# Altium PCB pcb.PcbDoc
Units mil, origin at the board's own origin, x right, y up, seen from the top; angles counter-clockwise.
Board outline 3145.67 x 1299.21 mil, 2 copper layers (Top Layer, Bottom Layer); 55 components, 48 nets, 216 pads, 159 vias.
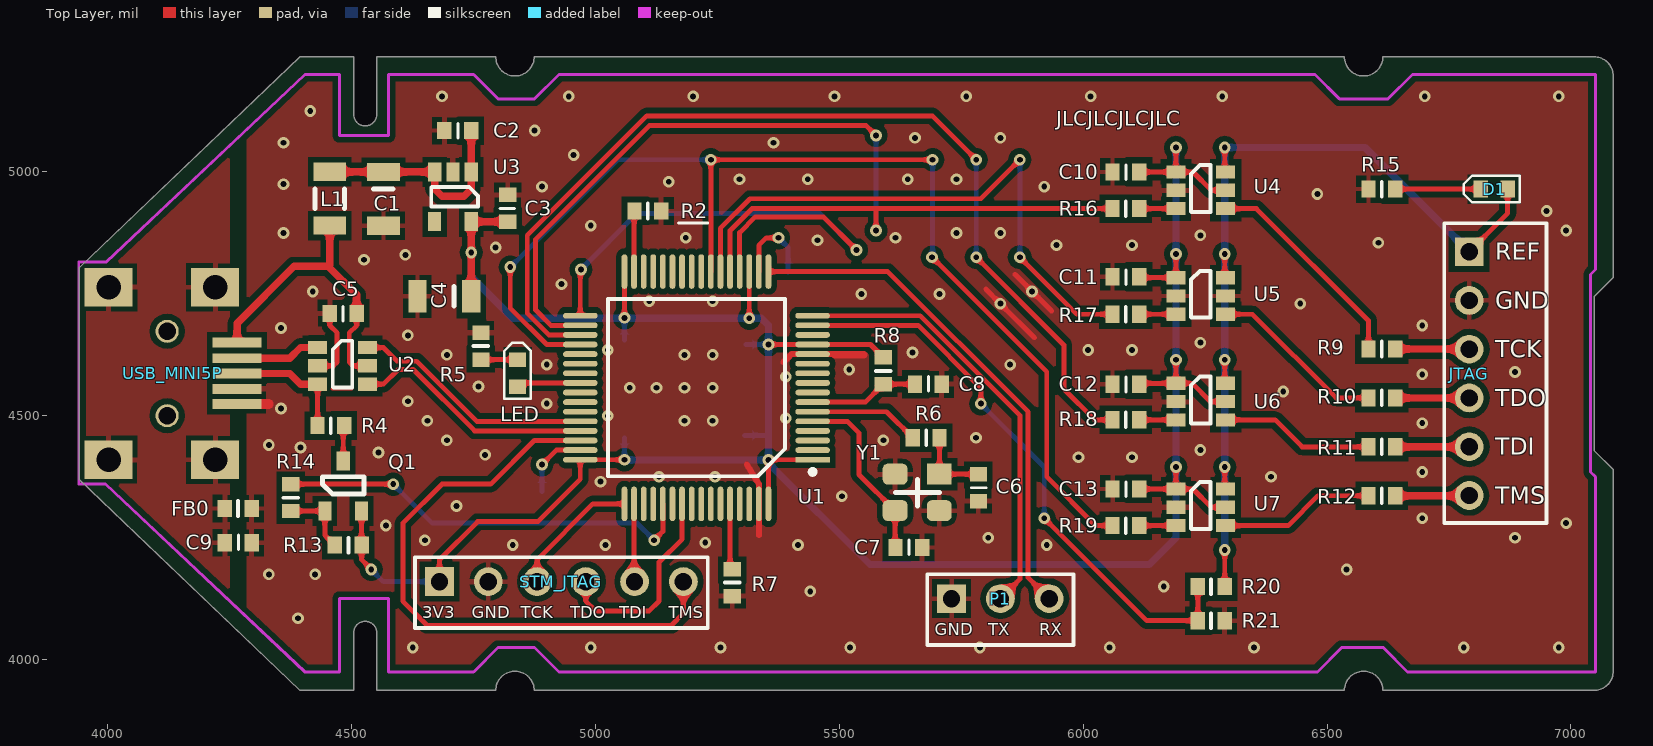
[diagram p0: Top Layer view]
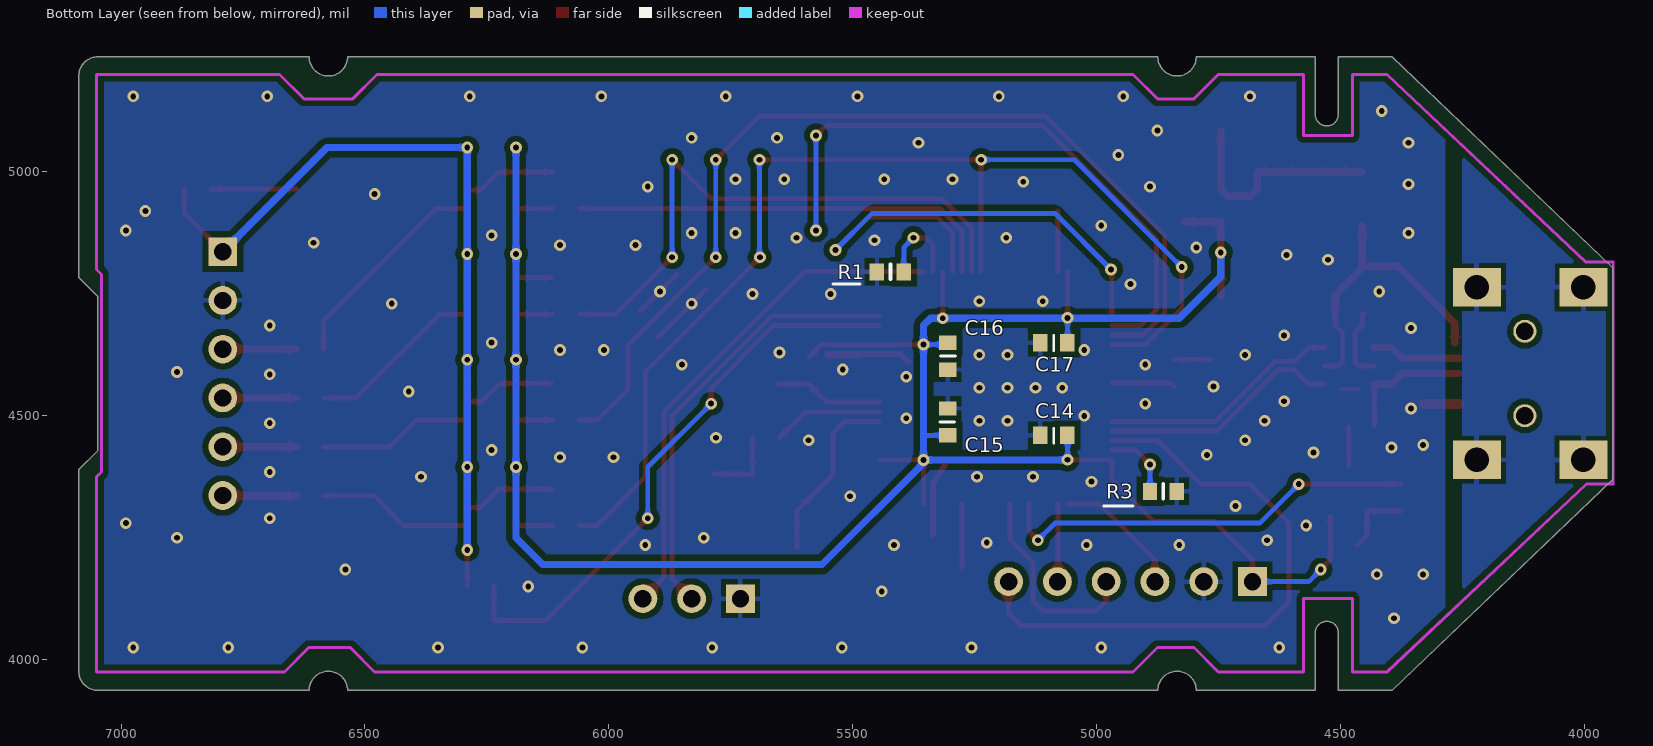
[diagram p1: Bottom Layer view, seen from below]

## Layer stack, top to bottom
Top Solder: solder mask 0.4, Solder Resist, Dk 3.5
Top Layer: signal copper 1.4
Dielectric 1: dielectric 12.6, FR-4, Dk 4.8
Bottom Layer: signal copper 1.4
Bottom Solder: solder mask 0.4, Solder Resist, Dk 3.5

## Board outline
4503.94,3937.01 4503.94,4055.12 cw(c4527.56,4055.12) 4551.18,4055.12 4551.18,3937.01 4795.28,3937.01 cw(c4834.65,3937.01) 4874.02,3937.01 6535.43,3937.01 cw(c6574.8,3937.01) 6614.17,3937.01 7047.24,3937.01 ccw(c7047.24,3976.38) 7086.61,3976.38 7086.61,4389.76 7047.24,4429.13 7047.24,4744.09 7086.61,4783.46 7086.61,5196.85 ccw(c7047.24,5196.85) 7047.24,5236.22 6614.17,5236.22 cw(c6574.8,5236.22) 6535.43,5236.22 4874.02,5236.22 cw(c4834.65,5236.22) 4795.28,5236.22 4551.18,5236.22 4551.18,5118.11 cw(c4527.56,5118.11) 4503.94,5118.11 4503.94,5236.22 4393.7,5236.22 3940.94,4803.15 3940.94,4370.08 4393.7,3937.01

## Design rules (kind name [scope] priority, off if disabled: settings)
Clearance [All] p1: gap=7
PolygonConnect PolygonConnect_via [IsVia vs InNet('GND')] p1: connectstyle=Direct reliefconductorwidth=10 reliefentries=4 polygonreliefangle="90 Angle" airgapwidth=10
PolygonConnect PolygonConnect_normal [All] p2: connectstyle=Relief reliefconductorwidth=10 reliefentries=4 polygonreliefangle="90 Angle" airgapwidth=10
RoutingVias [All] p1: holewidth=12 width=24 viastyle="Through Hole" minholewidth=12 minwidth=24 maxholewidth=200 maxwidth=300
SolderMaskExpansion [All] p1: expansion=4
Width [All] p1: maxlimit=30 minlimit=7 preferedwidth=12
30 further rules are at their usual default settings.

## Components (designator, comment, footprint, x,y, rotation, side; value= is the part's Value field where it differs from the comment)
C1 "CAP" C1206 4565,5000 r270 top
C2 "CAP Ceramics" C0603 4745,5085 r180 top
C3 "CAP Ceramics" C0603 4819.81,4898.03 r90 top
C4 "CAP" C1206 4745,4745 r180 top
C5 "CAP Ceramics" C0603 4510,4710 r180 top
C6 "CAP Ceramics" C0603 5785,4380 r270 top
C7 "CAP Ceramics" C0603 5615,4230 r0 top
C8 "CAP Ceramics" C0603 5655,4565 r0 top
C9 "CAP Ceramics" C0603 4240,4240 r0 top
C10 "CAP Ceramics" C0603 6115,5000 r180 top
C11 "CAP Ceramics" C0603 6115,4785 r180 top
C12 "CAP Ceramics" C0603 6115,4565 r180 top
C13 "CAP Ceramics" C0603 6115,4350 r180 top
C14 "CAP Ceramics" C0603 5060,4460 r0 bottom
C15 "CAP Ceramics" C0603 5305,4460 r90 bottom
C16 "CAP Ceramics" C0603 5305,4650 r270 bottom
C17 "CAP Ceramics" C0603 5060,4650 r0 bottom
D1 "LED" D0603 6870,4965 r180 top
FB0 "RES" R0603 4295,4310 r180 top
JTAG "Header 6" HDR1X6 6791.34,4836.61 r270 top locked
L1 "Inductor" L1206 4455,4890 r90 top
LED "LED" D0603 4840,4560 r90 top
P1 "Header 3" HDR1X3 5730,4125 r0 top
Q1 "S9012-PNP" SOT23-3 4445,4305 r0 top
R1 "Res" R0603 5450,4795 r180 bottom
R2 "Res" R0603 5135,4920 r180 top
R3 "Res" R0603 4835,4345 r0 bottom
R4 "RES" R0603 4485,4480 r180 top
R5 "Res" R0603 4765,4615 r90 top
R6 "Res" R0603 5650,4455 r0 top
R7 "Res" R0603 5280,4130 r90 top
R8 "Res" R0603 5590,4620 r270 top
R9 "RES" R0603 6640,4637 r180 top
R10 "RES" R0603 6640,4536.67 r180 top
R11 "RES" R0603 6640,4436.33 r180 top
R12 "RES" R0603 6640,4336 r180 top
R13 "RES" R0603 4465,4235 r0 top
R14 "RES" R0603 4375,4360 r270 top
R15 "Res" R0603 6640,4965 r180 top
R16 "RES" R0603 6115,4925 r180 top
R17 "RES" R0603 6115,4708.33 r180 top
R18 "RES" R0603 6115,4491.67 r180 top
R19 "RES" R0603 6115,4275 r180 top
R20 "Res" R0603 6290,4150 r180 top
R21 "Res" R0603 6290,4080 r180 top
STM_JTAG "Header 6" HDR1X6 4680,4160 r0 top locked
U1 "STM32F103RCT6" LQFP64_DE12_e0.5_PAD1.8x0.3_offset2.3_mm 5445,4410 r180 top locked
U2 "USBLC6-2SC6" SOT23-6 4430,4640 r270 top locked
U3 "LDO" SOT23-5 4745,5000 r180 top
U4 "SN74LVC1T45DBV" SOT23-6 6190,5000 r270 top
U5 "SN74LVC1T45DBV" SOT23-6 6190,4783.33 r270 top
U6 "SN74LVC1T45DBV" SOT23-6 6190,4566.67 r270 top
U7 "SN74LVC1T45DBV" SOT23-6 6190,4350 r270 top
USB_MINI5P "MiniUSB-SMT-5P" USB_MINI 3915,4803.15 r0 top locked
Y1 "Crystal" SMD3225 5705,4380 r180 top

## Footprints (in the part's own frame and the unit in brackets; to place one, negate y for a bottom-side part, rotate by r counter-clockwise, add the part's x,y. Pads: shape width x height; smd on the part's side, far side on the other; paste and mask are expansions set on the pad)
C0603 [mm]
  rect 0.75x0.9 smd mask+0.1: 1(0,0) 2(1.4,0)
  silkscreen extent 0.7,-0.36 0.7,0.4
C1206 [mm]
  rect 0.95x1.7 smd: 1(0,0) 2(2.8,0)
  silkscreen extent 0.89,-0.51 0.89,0.51
D0603 [mm]
  rect 0.75x0.9 smd mask+0.1: 1(0,0) 2(1.4,0)
  silkscreen extent -0.64,-0.69 2.29,0.69
HDR1X3 [mm] "Connector; Header; 3 Position"
  rect 1.5x1.5 hole 0.9: 1(0,0)
  round 1.5 hole 0.9: 2(2.54,0) 3(5.08,0)
  silkscreen extent -1.27,-2.41 6.35,1.27
HDR1X6 [mm] "Connector; Header; 6 Position"
  rect 1.5x1.5 hole 0.9: 1(0,0)
  round 1.5 hole 0.9: 2(2.54,0) 3(5.08,0) 4(7.62,0) 5(10.16,0) 6(12.7,0)
  silkscreen extent -1.48,-1.3 14.14,4.03
L1206 [mm]
  rect 0.95x1.7 smd: 1(0,0) 2(2.8,0)
  silkscreen extent 0.89,-0.76 1.91,0.76
LQFP64_DE12_e0.5_PAD1.8x0.3_offset2.3_mm [mm]
  rect 1.8x0.3 smd: 1(0,0)
  oval 1.8x0.3 smd: 2(0,-0.5) 3(0,-1) 4(0,-1.5) 5(0,-2) 6(0,-2.5) 7(0,-3) 8(0,-3.5) 9(0,-4) 10(0,-4.5) 11(0,-5) 12(0,-5.5) 13(0,-6) 14(0,-6.5) 15(0,-7) 16(0,-7.5) 33(12.1,-7.5) 34(12.1,-7) 35(12.1,-6.5) 36(12.1,-6) 37(12.1,-5.5) 38(12.1,-5) 39(12.1,-4.5) 40(12.1,-4) 41(12.1,-3.5) 42(12.1,-3) 43(12.1,-2.5) 44(12.1,-2) 45(12.1,-1.5) 46(12.1,-1) 47(12.1,-0.5) 48(12.1,0)
  oval 0.3x1.8 smd: 17(2.3,-9.8) 18(2.8,-9.8) 19(3.3,-9.8) 20(3.8,-9.8) 21(4.3,-9.8) 22(4.8,-9.8) 23(5.3,-9.8) 24(5.8,-9.8) 25(6.3,-9.8) 26(6.8,-9.8) 27(7.3,-9.8) 28(7.8,-9.8) 29(8.3,-9.8) 30(8.8,-9.8) 31(9.3,-9.8) 32(9.8,-9.8) 49(9.8,2.3) 50(9.3,2.3) 51(8.8,2.3) 52(8.3,2.3) 53(7.8,2.3) 54(7.3,2.3) 55(6.8,2.3) 56(6.3,2.3) 57(5.8,2.3) 58(5.3,2.3) 59(4.8,2.3) 60(4.3,2.3) 61(3.8,2.3) 62(3.3,2.3) 63(2.8,2.3) 64(2.3,2.3)
  silkscreen extent -0.13,-8.36 10.66,0.87
R0603 [mm]
  rect 0.75x0.9 smd mask+0.1: 1(0,0) 2(1.4,0)
  silkscreen extent 0.71,-0.38 0.71,0.38
SMD3225 [mil]
  rect 51x43 smd: 1(0.37,-0.37)
  rrect50% 51x43 smd: 2(90.92,-0.37) 3(90.92,74.44) 4(0.37,74.44)
  silkscreen extent 0,10 90,65
SOT23-3 [mm]
  rect 0.69x0.99 smd: 1(0,0) 2(1.906,0) 3(0.953,2.59)
  silkscreen extent -0.13,0.89 2.03,1.78
SOT23-5 [mm] "for LM2731,2010-6-26"
  rect 0.69x0.99 smd: 1(0,0) 2(0.953,0) 3(1.906,0) 4(1.91,2.59) 5(0,2.59)
  silkscreen extent -0.36,0.79 2.08,1.8
SOT23-6 [mm]
  rect 0.69x0.99 smd: 1(0,0) 2(0.953,0) 3(1.906,0) 4(1.906,2.59) 5(0.953,2.59) 6(0,2.59)
  silkscreen extent -0.36,0.79 2.08,1.8
USB_MINI [mil]
  rect 100x20 smd: 1(350,-153) 2(350,-185) 3(350,-216.33) 4(350,-248) 5(350,-279)
  round 47.23 / inner round 0 / far side round 47.23 hole 35.43: H1(206.5,-302.87) H2(206.5,-129.8)
  rect 98x79 hole 50: P1(86.53,-393.33) P2(304.83,-393.33) P3(304.83,-39.33) P4(86.53,-39.33)

## Part data
C1 C4: library part "CAP Polarity", "Polarized Capacitor (Surface Mount)"
C2 C3 C5 C6 C7 C8 C9 C10 C11 C12 C13 C14 C15 C16 C17: "Capacitor"
FB0 R4 R9 R10 R11 R12 R13 R14 R16 R17 R18 R19: "Res"
JTAG STM_JTAG: "Header, 6-Pin"
P1: "Header, 3-Pin"
Q1: library part S9012, "S9012-PNP-SOT23"
R1 R2 R3 R5 R6 R7 R8 R15 R20 R21: library part RES
U1: library part STM32F103R, "ST STM32 Cortex-M3"
U2: library part USBLC6-2, "USB EMI ESD Protect"
U3: library part XC6210B-3.3, "5V->3.3V"
U4 U5 U6 U7: library part SN74LVC1T45, "TI SN74LVC1T45"
USB_MINI5P: library part MiniUSB_5P, "MiniUSB SMT"
Y1: library part CRY

## Via types
v1: diameter 24, hole 12, Top Layer to Bottom Layer, tented both sides, 159 vias

## Nets (pads, with @x,y where several pads share a name; then routed paths per layer and width w, separated by ;. In a path a pad name is that pad's centre, name@x,y a point inside that pad or via, vN(x,y) a via of type N, cw(c..) or ccw(c..) an arc to the next point about the centre after c; other vN are vias at no path point)
3V3: C3.1 C4.1 C10.1 C11.1 C12.1 C13.1 C14.1 C15.1 C16.1 C17.1 Q1.2 R8.1 R13.2 STM_JTAG.1 U1.1 U1.13 U1.19 U1.32 U1.48 U1.64 U3.5 U4.1 U4.5 U5.1 U6.1 U6.5 U7.1 U7.5 | length 5689.3
  Top Layer w10: Q1.2@4520.04,4295 4520.04,4230.08 4520.12,4230 4520.12,4204.88 v1(4540,4185) ; STM_JTAG.1 4680,4205 4758,4283 4881.62,4283 4968.62,4370 U1.48 v1(5059.17,4410) ; v1(5059.17,4700.83) U1.32 ; v1(5315.08,4700.08) U1.19 ; U1.64 v1(5354.45,4409.45) 5355,4410 U1.1 ; v1(5354.45,4646.22) U1.13 5563.78,4646.22 R8.1 ; C13.1@6115.12,4350 U7.1 ; C10.1@6115.12,5000 U4.1 ; C12.1@6116.78,4566.67 U6.1 ; C11.1@6116.78,4783.33 U5.1 v1(6190,4831.97) ; v1(6190,4395) U7.1 ; v1(6190,4615) U6.1 ; v1(6190,5050) U4.1 ; U7.5 6262.52,4312.48 6225,4350 U7.1 ; U6.5 6260.85,4529.15 6223.33,4566.67 U6.1 ; U4.5 6262.52,4962.48 6225,5000 U4.1
  Top Layer w15: C4.1 v1(4745,4835) U3.5 C3.1
  Bottom Layer w10: v1(4540,4185) 4565,4160 STM_JTAG.1 ; v1(5059.17,4410) C14.1@5059.17,4454.17 ; C17.1@5059.17,4655.83 5059.17,4700.08 v1(5059.17,4700.83) ; C15.1 5349.45,4460 ; C16.1@5308.78,4646.22 v1(5354.45,4646.22)
  Bottom Layer w12: v1@5354.45,4403.07 v1(5354.45,4409.45)
  Bottom Layer w15: v1(4745,4835) 4745,4785 4829.92,4700.08 5059.17,4700.08 v1(5315.08,4700.08) 5339.92,4700.08 5354.45,4685.55 v1(5354.45,4646.22) v1(5354.45,4409.45) v1@5059.73,4409.45 ; v1@5354.45,4403.07 5562.52,4195 6135,4195 6190,4250 v1(6190,4395) v1(6190,4615) v1(6190,4831.97) v1(6190,5050)
5V: C1.1 C2.1 L1.2 U3.1 U3.3 | length 457.2
  Top Layer w15: L1.2 U3.3@4669.72,5000.24 ; U3.3 4669.96,4965.04 4685,4950 4730,4950 4745,4965 U3.1 C2.1
GND: C1.2 C2.2 C3.2 C4.2 C5.2 C6.2 C7.2 C8.2 C9.2 C10.2 C11.2 C12.2 C13.2 C14.2 C15.2 C16.2 C17.2 FB0.1 JTAG.2 P1.1 R1.1 R2.1 R3.1 R5.2 R7.1 R15.2 R21.1 STM_JTAG.2 U1.12 U1.63 U2.2 U3.2 U4.2 U5.2 U5.5 U6.2 U7.2 USB_MINI5P.4 USB_MINI5P.5 Y1.2 Y1.4 | length 801.6
  Top Layer w10: U2.2 4462.48,4602.48 4470,4610 4470,4670 4454.88,4685.12 C5.2@4454.88,4705 ; C5.2@4449.88,4710 C5.2@4454.88,4705 ; C5.2 C5.2@4454.88,4705 ; 5800,4760 v1(5830,4730) 5900,4660 ; 5860,4790 v1(5895,4755) 5935,4715
  Top Layer w12: 5310,4400 5334.76,4360 U1.63 5334.76,4255.24 ; 5385,4610 5401.53,4626.53 U1.12 5490,4626.53
  Top Layer w15: 5490.45,4625.04 5550,4624.95
  Top Layer w20: USB_MINI5P.5@4255.51,4524.15 4330,4524.15
  other v1: 4625,4025 4990,4025 5256,4025 5522,4025 5788,4025 6054,4025 6350,4025 6780,4025 6975,4025 4390,4085 5440,4140 6165,4150 4330,4175 4425,4175 6540,4185 4830,4235 5020,4235 5415,4235 5925,4235 5225,4240 4650,4245 5805,4250 6885,4250 4570,4275 6990,4280 6695,4290 4715,4315 5505,4335 5010,4365 5130,4375 5245,4375 6385,4375 6695,4385 5990,4415 6100,4415 4773.56,4420 4555,4425 6240,4430 4395,4435 4330,4440 4695,4450 5590,4450 5780,4455 6695,4485 4655,4490 5182.5,4490 5240,4490 5390,4495 5025,4500 4355,4515 4900,4525 4615,4530 6410,4550 5070,4557.5 5125,4557.5 5182.5,4557.5 5240,4557.5 4760,4560 5390,4580 6695,4585 6885,4590 5520,4595 4900,4605 5850,4605 4695,4625 5182.5,4625 5240,4625 5650,4630 5025,4635 6010,4635 6100,4635 6240,4650 4615,4665 4355,4680 6695,4685 6445,4730 5110,4735 5240,4735 5545,4750 5705,4750 4420,4755 4930,4770 4525,4820 4610,4830 4795,4845 5945,4850 6100,4850 6605,4855 5455,4860 5185,4865 5615,4865 6240,4870 4360,4875 5740,4875 5830,4875 6990,4880 4990,4890 6950,4920 6480,4955 4890,4970 5920,4970 4360,4975 5150,4980 5295,4985 5435,4985 5640,4985 5740,4985 4955,5035 4360,5060 5365,5060 5655,5070 5830,5070 4875,5085 4415,5125 4685,5155 4945,5155 5200,5155 5490,5155 5760,5155 6015,5155 6285,5155 6700,5155 6975,5155
JTAG_TCK: R9.2 U4.4 | length 446.2
  Top Layer w10: U4.4 6355.04,4924.96 6584.88,4695.12 R9.2
JTAG_TDI: R11.2 U6.4 | length 315.8
  Top Layer w10: U6.4 6393.37,4491.63 6448.67,4436.33 R11.2
JTAG_TDO: R10.2 U5.4 | length 364
  Top Layer w10: U5.4 6346.71,4708.29 6518.33,4536.67 R10.2
JTAG_TMS: R12.2 U7.4 | length 318.2
  Top Layer w10: U7.4 6419.96,4274.96 6481,4336 R12.2
NetC6_1: C6.1 R6.2 Y1.1 | length 154.5
  Top Layer w10: Y1.1 C6.1@5785,4380.37 ; Y1.1@5705.12,4380.85 R6.2
NetD1_2: D1.2 R15.1 | length 174.9
  Top Layer w10: R15.1 D1.2
NetJTAG_3: JTAG.3 R9.1 | length 151
  Top Layer w15: R9.1 JTAG.3@6790.95,4637
NetJTAG_4: JTAG.4 R10.1 | length 151.3
  Top Layer w15: R10.1 JTAG.4@6791.29,4536.67
NetJTAG_5: JTAG.5 R11.1 | length 151.1
  Top Layer w15: R11.1 JTAG.5@6791.06,4436.33
NetJTAG_6: JTAG.6 R12.1 | length 150.7
  Top Layer w15: R12.1 JTAG.6@6790.72,4336
NetLED_2: LED.2 R5.1 | length 74.9
  Top Layer w10: R5.1@4765.12,4615.12 LED.2
NetQ1_1: Q1.1 R13.1 R14.2 | length 148.2
  Top Layer w10: R14.2 Q1.1@4444.88,4304.88 ; Q1.1 4445,4255 R13.1
NetQ1_3: Q1.3 R4.1 | length 80.6
  Top Layer w10: Q1.3@4482.52,4396.97 R4.1@4482.52,4477.52
NetR7_2: R7.2 U1.60 | length 130
  Top Layer w10: R7.2@5275.71,4189.41 U1.60
NetR16_1: R16.1 U4.3 | length 75
  Top Layer w10: R16.1 U4.3
NetR17_1: R17.1 U5.3 | length 75
  Top Layer w10: R17.1 U5.3
NetR18_1: R18.1 U6.3 | length 75
  Top Layer w10: R18.1@6115.04,4491.63 U6.3
NetR19_1: R19.1 U7.3 | length 75
  Top Layer w10: R19.1 U7.3
SPI1_MCK: R16.2 U1.21 U1.34 | length 2179.4
  Top Layer w10: U1.34 4908.45,4685.59 4877,4717.04 4877,4862 5110,5095 5555,5095 v1(5575,5075) ; U1.21 5275.71,4880 5320.71,4925 5575,4925 ; v1(5575,4880) 5575,4925 ; R16.2 5575,4925
  Bottom Layer w10: v1(5575,4880) v1(5575,5075)
SPI1_MISO: R17.2 U1.22 | length 1189
  Top Layer w10: U1.22 5256.02,4884.36 5316.67,4945 5790,4945 v1(5870,5025) ; v1(5870,4825) 5986.67,4708.33 R17.2
  Bottom Layer w10: v1(5870,4825) v1@5870,5015
SPI1_MOSI: R19.2 U1.23 U1.36 | length 2367.6
  Top Layer w10: v1(4825,4805) 4825,4720.96 4899.74,4646.22 U1.36 ; U1.23 v1(5236.34,5025) v1(5691,5025) ; v1(5690,4825) 5925,4590 5925,4375 6025,4275 R19.2
  Bottom Layer w10: v1(4825,4805) 5045,5025 v1(5236.34,5025) ; v1@5691,4826 v1(5691,5025)
SPI1_NSS: U1.20 U1.33 | length 1100
  Top Layer w10: U1.33 4968.62,4798.62 v1(4970,4800) ; U1.20 5295.39,4875.64 5327.75,4908 5467,4908 v1(5535,4840)
  Bottom Layer w10: v1(4970,4800) 5085,4915 5460,4915 v1(5535,4840)
SPI2_MISO: R18.2 U1.35 | length 2016.6
  Top Layer w10: U1.35 4904.1,4665.9 4860,4710 4860,4870 5105,5115 5690.5,5115 v1(5780.5,5025) ; v1(5780.5,4825) 5960.5,4645 5960.5,4554.5 6023.33,4491.67 R18.2
  Bottom Layer w10: v1(5780.5,4825) v1(5780.5,5025)
STM_ADC: R20.2 R21.2 U1.15 | length 1190.9
  Top Layer w10: U1.15 5661.33,4685.59 5790,4556.92 v1(5790,4525) ; v1(5920,4290) 6130,4080 R21.2 R20.2
  Bottom Layer w10: v1(5790,4525) 5920,4395 v1(5920,4290)
STM_DM: U1.44 U2.6 | length 499.3
  Top Layer w10: U2.6 4565,4640 4593,4612 4633,4612 4756.26,4488.74 U1.44
STM_DP: U1.45 U2.4 | length 501.3
  Top Layer w10: U2.4 4564.96,4564.96 4595,4595 4625.96,4595 4751.9,4469.06 U1.45
STM_JTCK: STM_JTAG.3 U1.49 | length 271.6
  Top Layer w10: STM_JTAG.3 4880,4205 4994.45,4319.45 U1.49
STM_JTDI: STM_JTAG.5 U1.50 | length 158.3
  Top Layer w10: STM_JTAG.5@5078.86,4161.14 U1.50
STM_JTDO: STM_JTAG.4 U1.55 | length 425.6
  Top Layer w10: STM_JTAG.4 4980,4120 5000,4100 5110,4100 5130,4120 5130,4200 5177.28,4247.28 U1.55
STM_JTMS: STM_JTAG.6 U1.46 | length 1264.8
  Top Layer w10: U1.46 4874.37,4449.37 4785,4360 4685,4360 4605,4280 4605,4120 4655,4070 5155,4070 5180,4095 STM_JTAG.6
STM_LED: LED.1 U1.40 | length 131.7
  Top Layer w10: LED.1 4847.48,4567.48 U1.40
STM_NRST: C8.1 R8.2 U1.7 | length 225.1
  Top Layer w10: U1.7 5553.23,4528.11 R8.2 C8.1@5654.88,4564.88
STM_OSCIN: C7.1 U1.5 Y1.3 | length 370.5
  Top Layer w10: U1.5 5516.26,4488.74 5540,4465 5540,4379.65 Y1.3 C7.1@5614.08,4230
STM_OSCOUT: R6.1 U1.6 | length 227.1
  Top Layer w10: U1.6 5596.57,4508.43 R6.1
STM_PIN18: R1.2 U1.18 | length 178.7
  Top Layer w10: U1.18 5334.76,4849.76 5350,4865 v1(5375,4865)
  Bottom Layer w10: v1(5375,4865) 5394.88,4845.12 R1.2
STM_PIN31: R2.2 U1.31 | length 124.6
  Top Layer w10: U1.31 5078.86,4918.98 R2.2
STM_PIN47: R3.2 U1.47 | length 145.8
  Top Layer w10: v1(4890,4400) 4919.69,4429.69 U1.47
  Bottom Layer w10: R3.2@4890,4345.12 v1(4890,4400)
STM_RX: P1.3 U1.17 | length 1052.6
  Top Layer w10: U1.17 5599.17,4795.83 5887,4508 5887,4168 P1.3
STM_TX: P1.2 U1.16 | length 902.2
  Top Layer w10: U1.16 5665.68,4705.27 5870,4500.96 5870,4165 P1.2
STM_USBEN: R14.1 U1.53 | length 874.5
  Top Layer w10: R14.1 v1(4585,4360) ; v1(5120,4245) 5137.91,4262.91 U1.53
  Bottom Layer w10: v1(4585,4360) 4665,4280 5085,4280 v1(5120,4245)
USB_DM: U2.1 USB_MINI5P.2 | length 183.5
  Top Layer w15: USB_MINI5P.2@4255.51,4618.15 4373.15,4618.15 4395,4640 U2.1
USB_DP: R4.2 U2.3 USB_MINI5P.3 | length 268.4
  Top Layer w10: R4.2@4430,4480.12 U2.3
  Top Layer w15: USB_MINI5P.3@4255.51,4586.82 4373.18,4586.82 4395.04,4564.96 U2.3
USB_SHIED: C9.1 FB0.2 USB_MINI5P.P1 USB_MINI5P.P2 USB_MINI5P.P3 USB_MINI5P.P4
VBUS: C5.1 L1.1 U2.5 USB_MINI5P.1 | length 631.5
  Top Layer w10: C5.1 4510,4685 4495,4670 4495,4610 4502.52,4602.48 U2.5
  Top Layer w15: USB_MINI5P.1 4265,4690 4381.5,4806.5 4451.5,4806.5 ; L1.1@4451.5,4876.5 L1.1@4455,4880 ; L1.1 L1.1@4455,4880 ; C5.1 4510,4748 4451.5,4806.5 ; 4451.5,4806.5 4455,4810 L1.1@4455,4880
VREF: D1.1 JTAG.1 R20.1 U4.6 U5.6 U6.6 U7.6 | length 1837.6
  Top Layer w10: R20.1 v1(6290,4225) ; U7.6@6290,4351.97 v1(6290,4395) ; U6.6@6290,4568.64 v1(6290,4615) ; U5.6@6290,4785.3 v1(6290,4831.97) ; v1(6290,5050) 6290,5001.97 U4.6 ; JTAG.1 6870,4915.28 D1.1
  Bottom Layer w15: v1(6290,4225) v1(6290,4395) v1(6290,4615) v1(6290,4831.97) v1(6290,5050) 6577.95,5050 JTAG.1
pads on no net: U1.2 U1.3 U1.4 U1.8 U1.9 U1.10 U1.11 U1.14 U1.24 U1.25 U1.26 U1.27 U1.28 U1.29 U1.30 U1.37 U1.38 U1.39 U1.41 U1.42 U1.43 U1.51 U1.52 U1.54 U1.56 U1.57 U1.58 U1.59 U1.61 U1.62 U3.4 USB_MINI5P.H1 USB_MINI5P.H2
copper on no net: | length 40
  Top Layer w7: 4460,4555 4500,4555

## Polygon pours and split planes (outlines as drawn)
GND on Top Layer "Bottom Layer-No Net" (solid, remove dead copper, pour order 28): 4355,5275 4780,5275 4780,3835 4355,3835
GND on Top Layer "Bottom Layer-No Net" (solid, remove dead copper, pour order 22): 4685,5285 7135,5285 7134.99,3820 4684.99,3820
USB_SHIED on Top Layer "Bottom Layer-No Net" (solid, remove dead copper, pour order 6): 3925,5145 4250,5145 4250,3985 3925,3985
GND on Top Layer "Bottom Layer-No Net" (solid, remove dead copper, pour order 10): 4285,5290 4385,5290 4385,3880 4285,3880
GND on Bottom Layer "Bottom Layer-No Net" (solid, remove dead copper, pour order 20): 4285,5245 4385,5245 4385,3925 4285,3925
USB_SHIED on Bottom Layer "Bottom Layer-No Net" (solid, remove dead copper, pour order 8): 3845,5118.11 4250,5118.11 4250,4055.12 3845,4055.12
GND on Bottom Layer "Bottom Layer-No Net" (solid, remove dead copper, pour order 24): 4330,5405 7130,5405 7130,3815 4330,3815

## Keep-outs
Keep-Out Layer:
  lines w6: 3940.29,4360 3940.29,4473.67 3940.29,4490 3940.29,4700 3940.29,4815 3996.1,4815 4404.2,5200 4475,5200 4475,5075 4575,5075 4575,5200 4750,5200 4800,5150 4875,5150 4925,5200 6475,5200 6525,5150 6625,5150 6675,5200 7050,5200 7050,4800 7040,4790 7040,4385 7050,4375 7050,3975 6665,3975 6615,4025 6530,4025 6480,3975 4925,3975 4875,4025 4800,4025 4750,3975 4575,3975 4575,4125 4475,4125 4475,3975 4403.5,3975 3995.4,4360 3940.29,4360

## Silkscreen, mask and mechanical layers (free items; w line width, h text height)
Top Overlay:
  lines w6: 5170,4895 5230,4895
  text "JLCJLCJLCJLC" at 5945,5095 h30
  text "REF" at 6845,4820 h35
  text "GND" at 6845,4720 h35
  text "TCK" at 6845,4620 h35
  text "TDO" at 6845,4520 h35
  text "TDI" at 6845,4420 h35
  text "TMS" at 6845,4320 h35
  text "3V3" at 4645,4085 h25
  text "GND" at 4746,4085 h25
  text "TCK" at 4847,4085 h25
  text "TDO" at 4948,4085 h25
  text "TDI" at 5049,4085 h25
  text "TMS" at 5150,4085 h25
  text "GND" at 5695,4050 h25
  text "TX" at 5805,4050 h25
  text "RX" at 5910,4050 h25
Bottom Overlay:
  lines w6: 4925,4315 4985,4315 ; 5485,4770 5540,4770
Mechanical 1:
  the board outline again, w5.98
Mechanical 13:
  circle w5.98: c4842.52,4586.61 r39.37
  lines w6: 6740,4090 6740,5085 6950,5085 6950,4085 6745,4085 6740,4090
  text "LED" at 4815,4575 h20